# EAGLE board Reciever PCB (EAGLE 9.6.2)
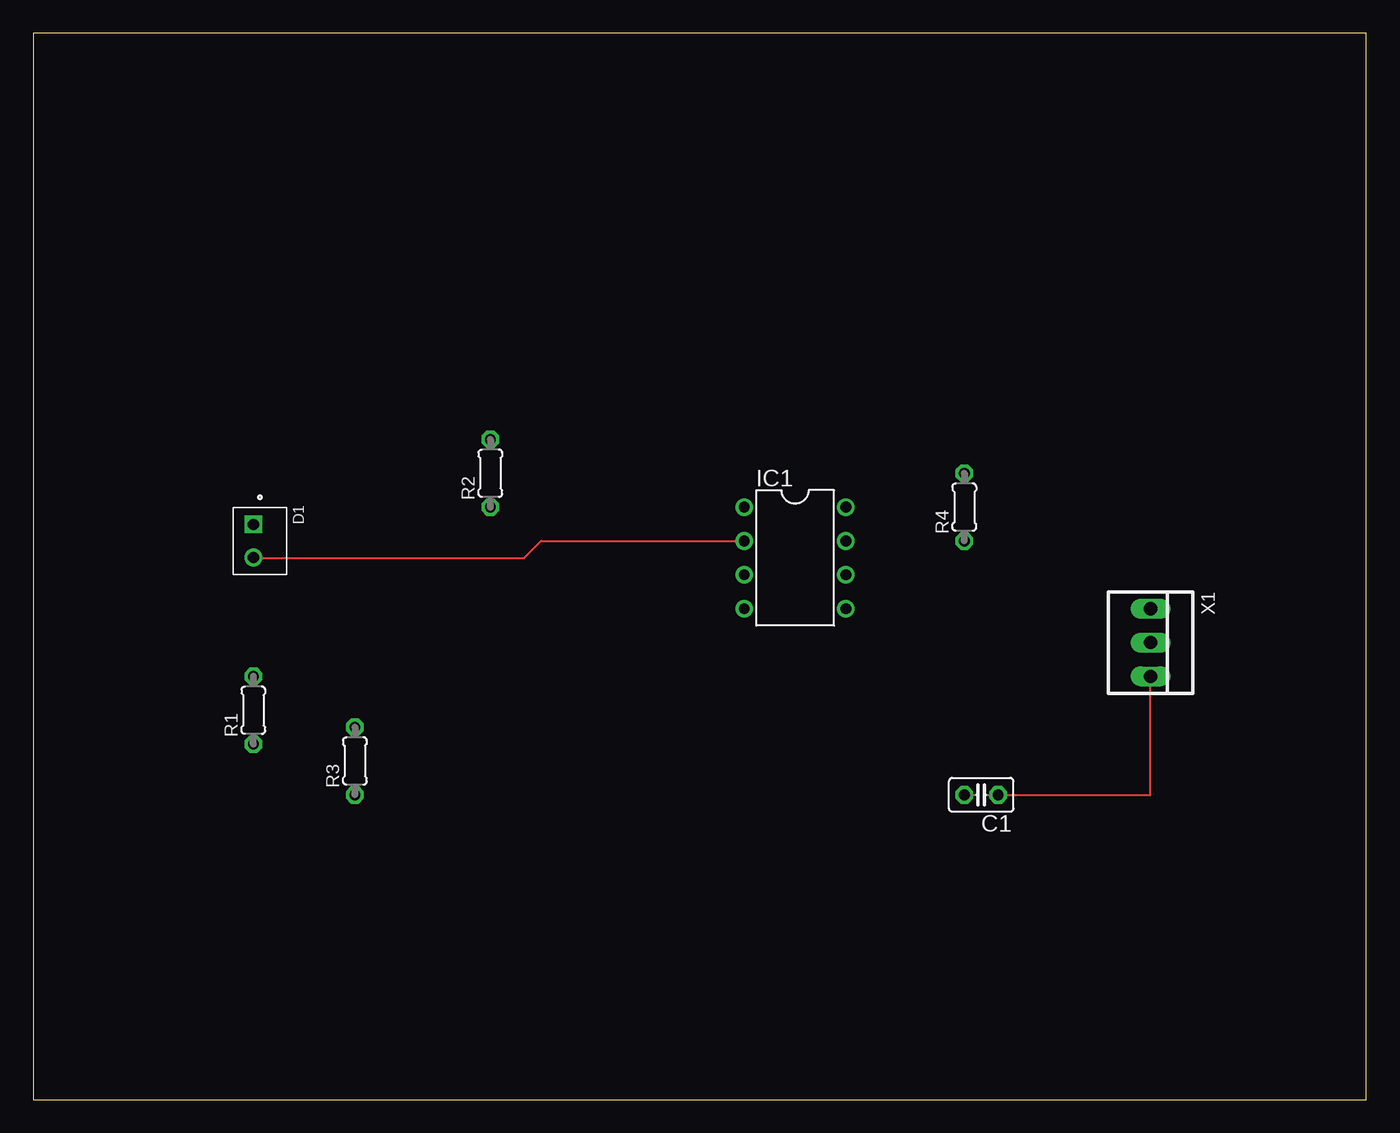
[diagram p0: board, top side]
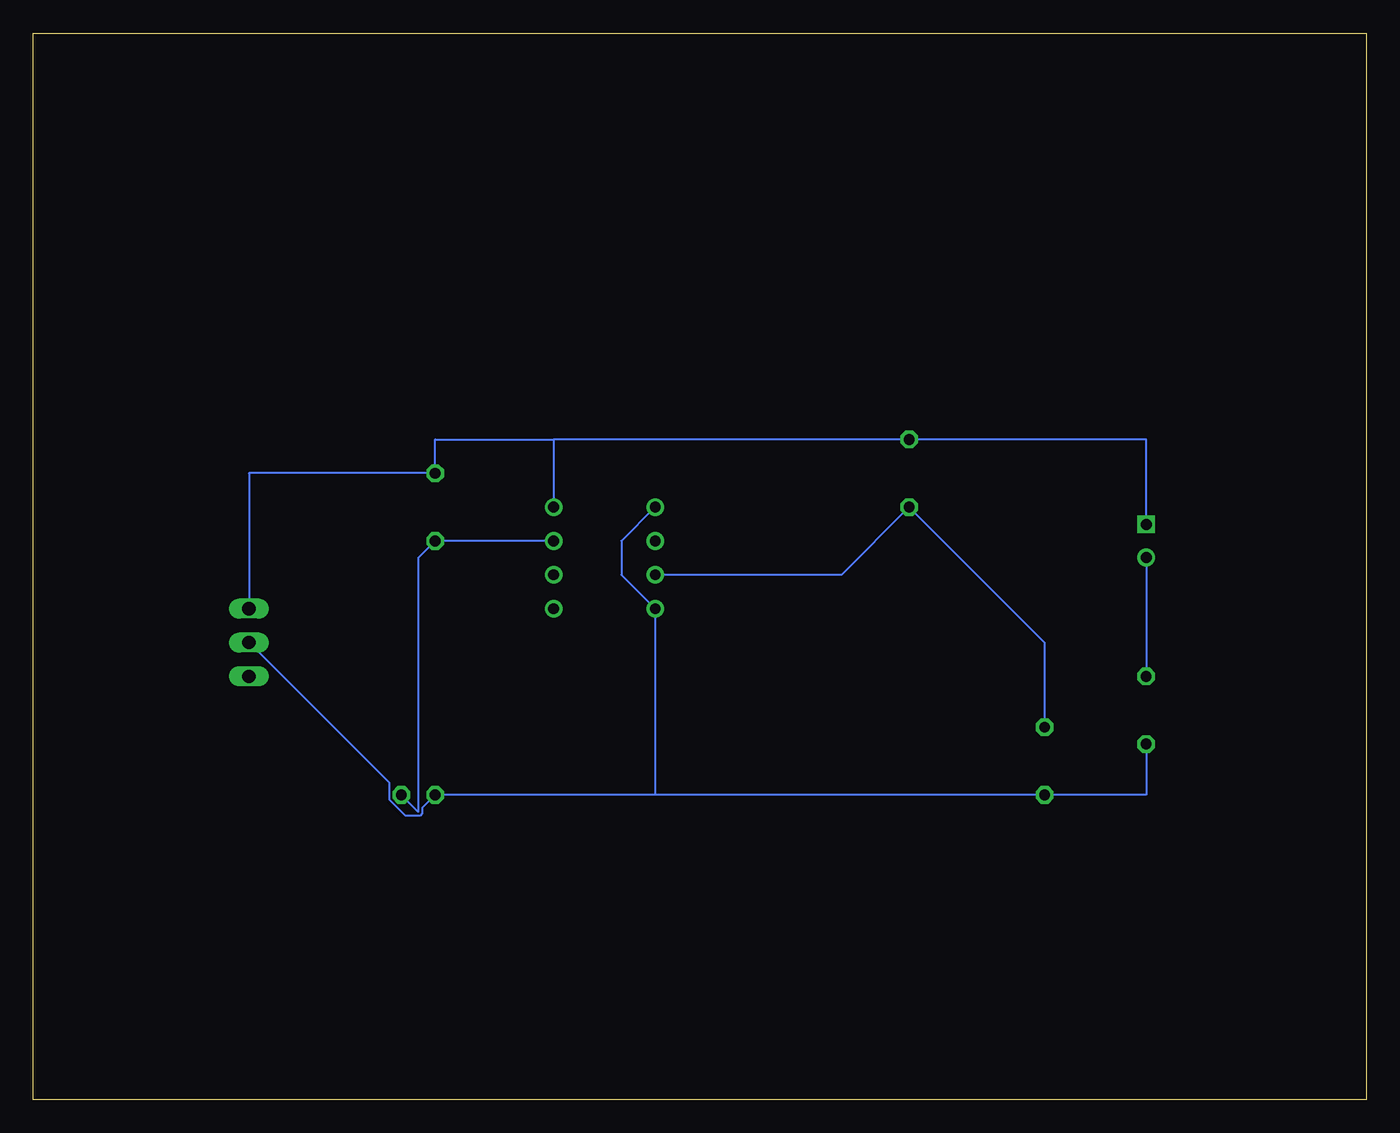
[diagram p1: board, bottom side, seen from below]

Size 100 x 80 mm. Coordinates in mm from the lower left corner, seen from the top.
Outline: 0,0 100,0 100,80 0,80 0,0
Copper layers (1*16): Top 0.035mm / dielectric 1.5mm / Bottom 0.035mm
Design rules "default": minimum track width 6mil, minimum drill 0.35mm, track to track 6mil, track to pad 6mil, pad to pad 6mil, via to via 6mil, smd to smd 6mil, copper to edge 40mil, drill to drill 6mil, minimum pad ring 10mil, minimum via ring 8mil, stop-mask expansion 4mil, vias tented up to drill 0mil, thermal gap 10mil

## Footprints (pad centres in the part's own frame; a part is rotated, then mirrored left to right if it is on the bottom)
C025-025X050 = drill 0.813 octagon: 1 -1.27,0; 2 1.27,0
DIO_BPW41N = drill 0.83 pad 1.25: A 1.25,0 | drill 0.83 pad 1.25 square: C -1.25,0
DIL08 = drill 0.813 pad 1.27: 1 -3.81,-3.81; 2 -1.27,-3.81; 3 1.27,-3.81; 4 3.81,-3.81; 5 3.81,3.81; 6 1.27,3.81; 7 -1.27,3.81; 8 -3.81,3.81
0204/5 = drill 0.813 octagon: 1 -2.54,0; 2 2.54,0
22-23-2031 = drill 1 long: 1 -2.54,0; 2 0,0; 3 2.54,0

## Placement (x,y rotation side)
C1  10pf  [C025-025X050]  71.12,22.86 180 top
D1  BPW41N  [DIO_BPW41N]  16.51,41.91 270 top
IC1  LM311N  [DIL08]  57.15,40.64 270 top
R1  120K  [0204/5]  16.51,29.21 90 top
R2  100K  [0204/5]  34.29,46.99 90 top
R3  22K  [0204/5]  24.13,25.4 90 top
R4  1K  [0204/5]  69.85,44.45 90 top
X1  22-23-2031  [22-23-2031]  83.82,34.29 270 top

## Library data of the parts
C1 = rcl; SPICEPREFIX: C
D1 = BPW41N; AVAILABILITY: In Stock; DESCRIPTION: Photodiode 940nm 130° Radial, Side View; MF: Vishay Semiconductor Opto Division; MP: BPW41N; PACKAGE: None; PRICE: None; PURCHASE-URL: https://pricing.snapeda.com/search/part/BPW41N/?ref=eda
IC1 = linear
R1-R4 = rcl; SPICEPREFIX: R
X1 = con-molex; MF: MOLEX; MPN: 22-23-2031; OC_FARNELL: 1462950; OC_NEWARK: 30C0862

## Nets
N$1: D1.A IC1.2 R1.2
N$2: C1.2 IC1.1 IC1.4 R1.1 R3.1 X1.2
N$3: D1.C IC1.8 R2.2 R4.2 X1.1
N$4: IC1.3 R2.1 R3.2
N$5: C1.1 IC1.7 R4.1 X1.3

## Tracks (layer width: path | path; a pad name or v marks a point on that pad's centre or on a via)
N$1
  Top 0.152: D1.A 16.53,40.64 36.83,40.64 38.1,41.91 IC1.2
  Bottom 0.152: D1.A R1.2
N$2
  Bottom 0.152: R1.1 16.51,22.86 R3.1 53.34,22.86 | 53.34,22.86 C1.2 70.81,21.89 70.81,21.46 70.99,21.29 72.07,21.29 73.28,22.49 73.28,23.75 X1.2 | IC1.1 55.88,41.91 55.88,39.37 IC1.4 53.34,22.86
N$3
  Bottom 0.152: D1.C 16.51,49.53 R2.2 60.96,49.53 | 60.96,49.53 IC1.8 | X1.1 83.82,46.99 R4.2 69.85,49.53 60.96,49.53
N$4
  Bottom 0.152: IC1.3 39.37,39.37 R2.1 24.13,34.29 R3.2
N$5
  Top 0.152: C1.1 83.82,22.86 X1.3
  Bottom 0.152: IC1.7 R4.1 71.12,40.64 71.12,21.59 C1.1